# Altium PCB newUTC.PcbDoc
Units mm, origin at the board's own origin, x right, y up, seen from the top; angles counter-clockwise.
Board outline 67.2 x 65.1 mm, 2 copper layers (Top Layer, Bottom Layer); 67 components, 49 nets, 278 pads, 72 vias.
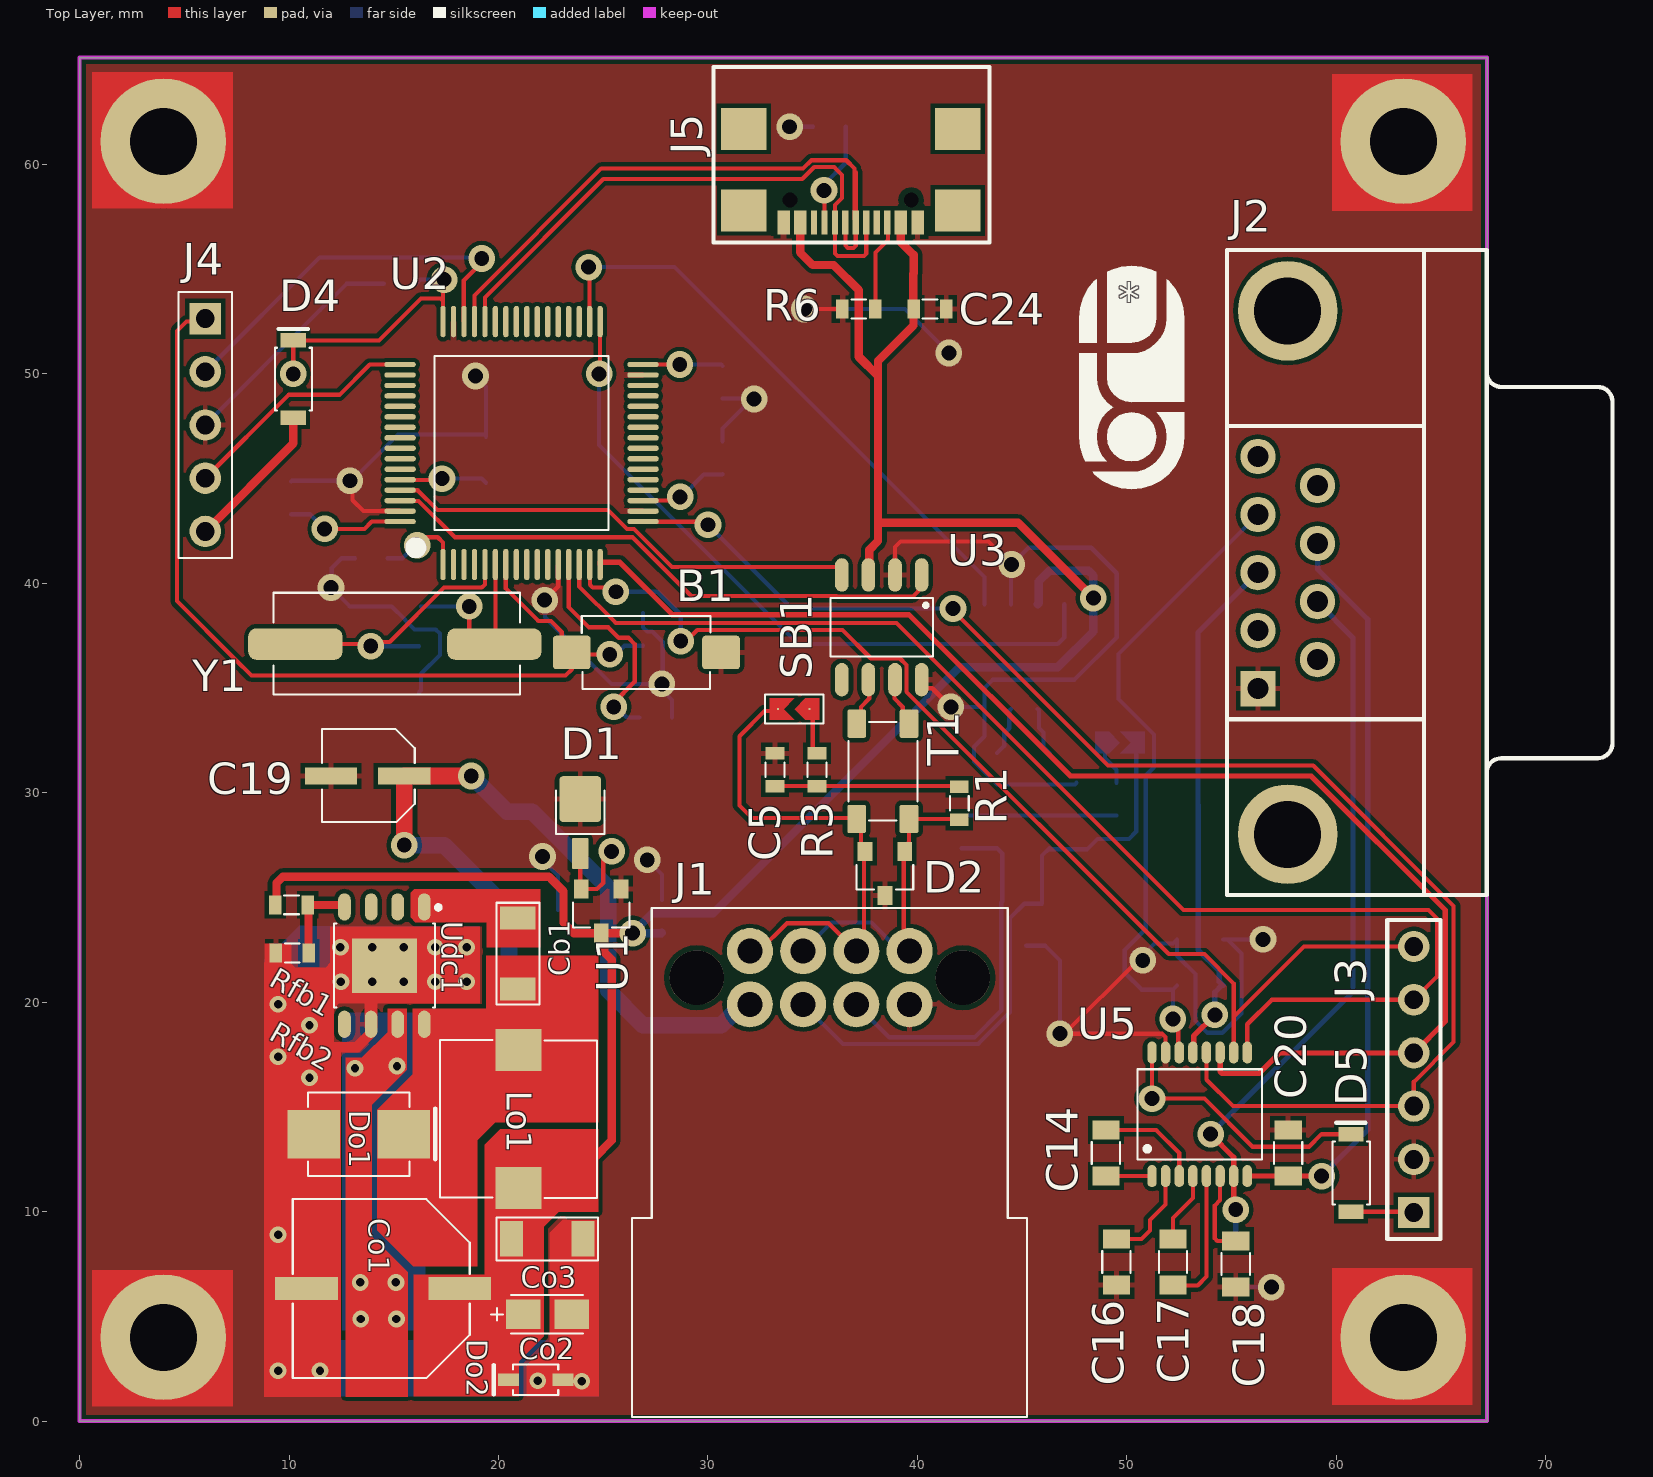
[diagram p0: Top Layer view]
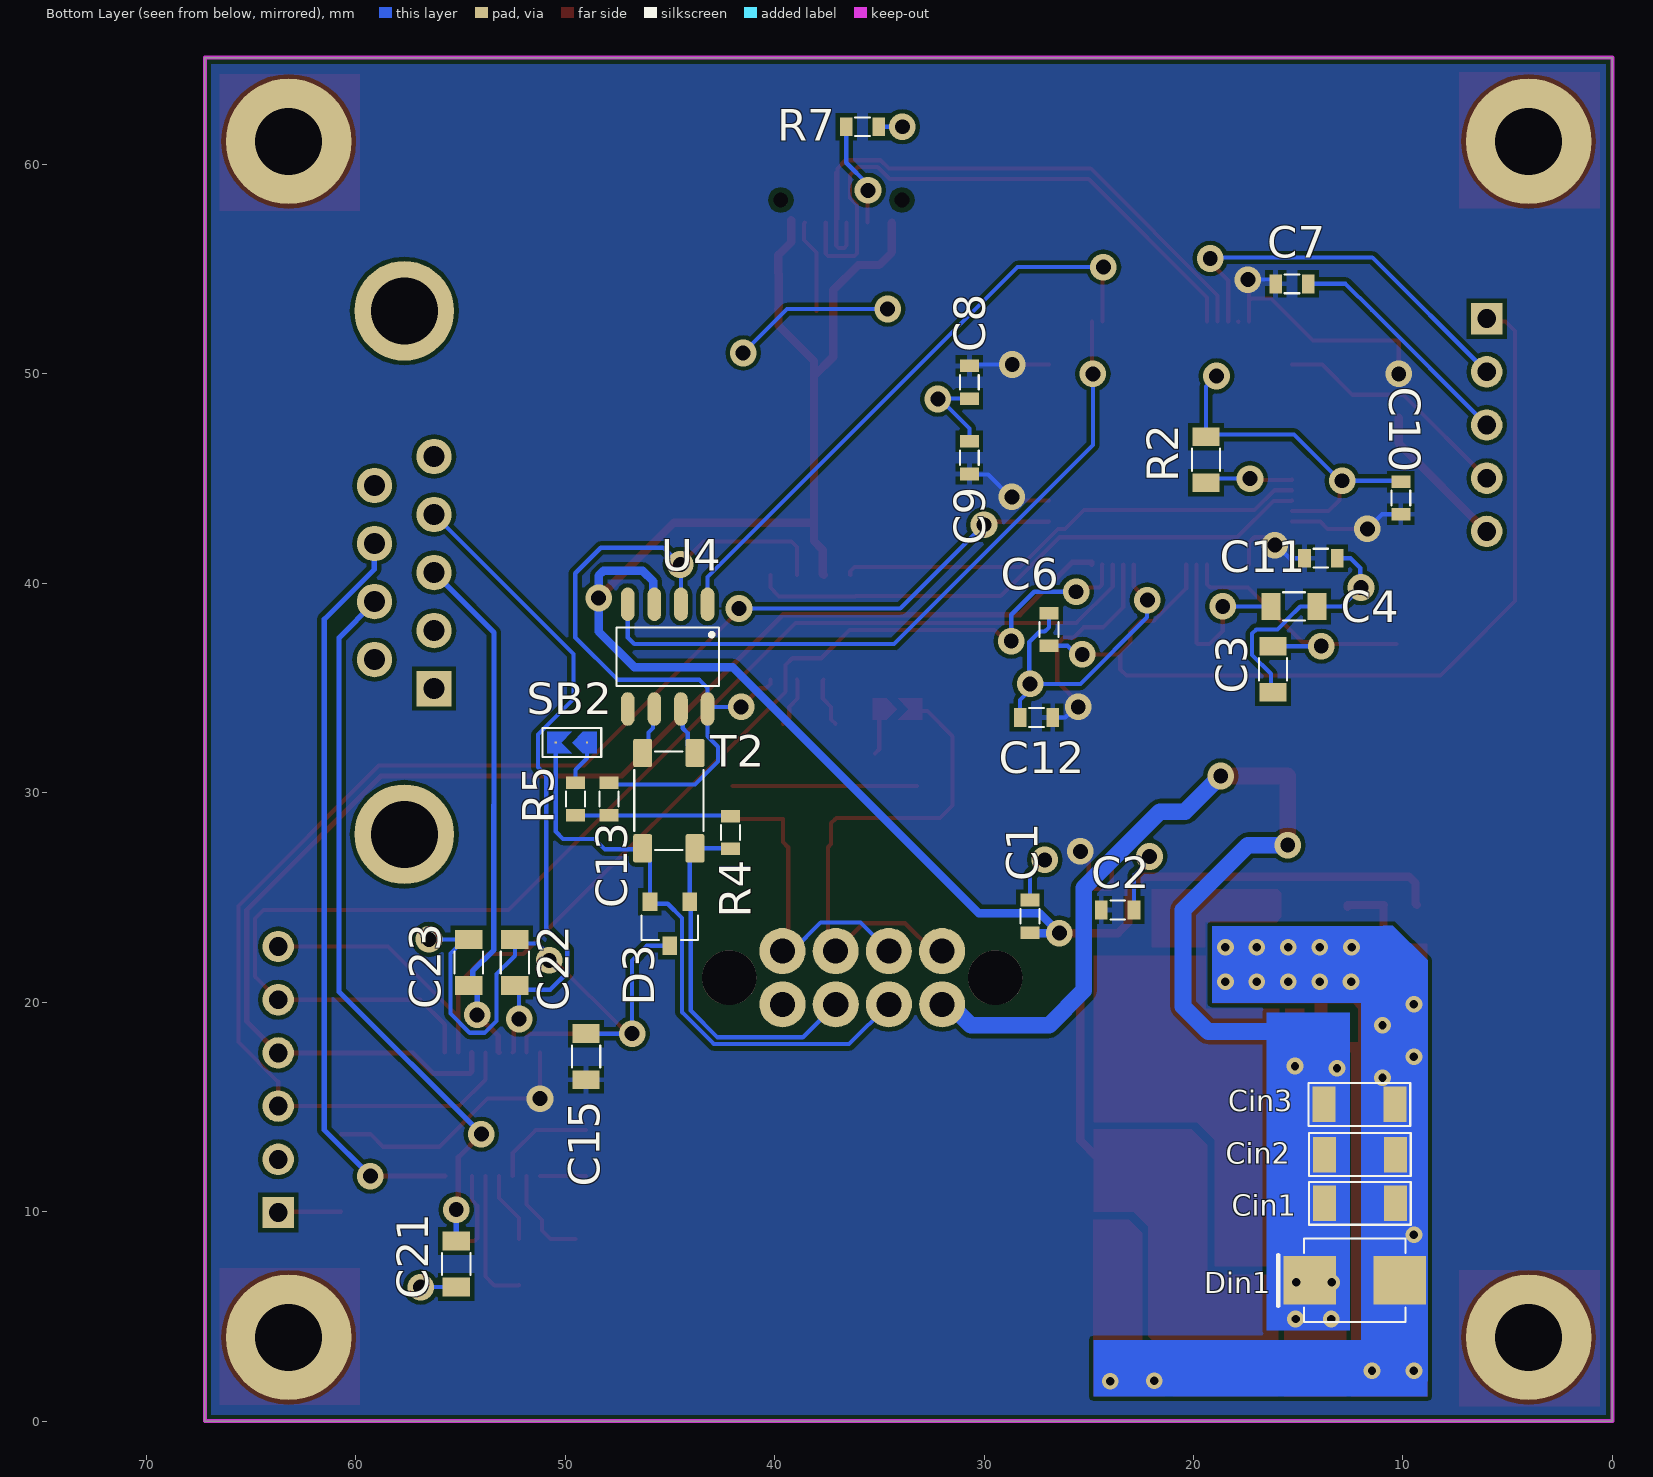
[diagram p1: Bottom Layer view, seen from below]
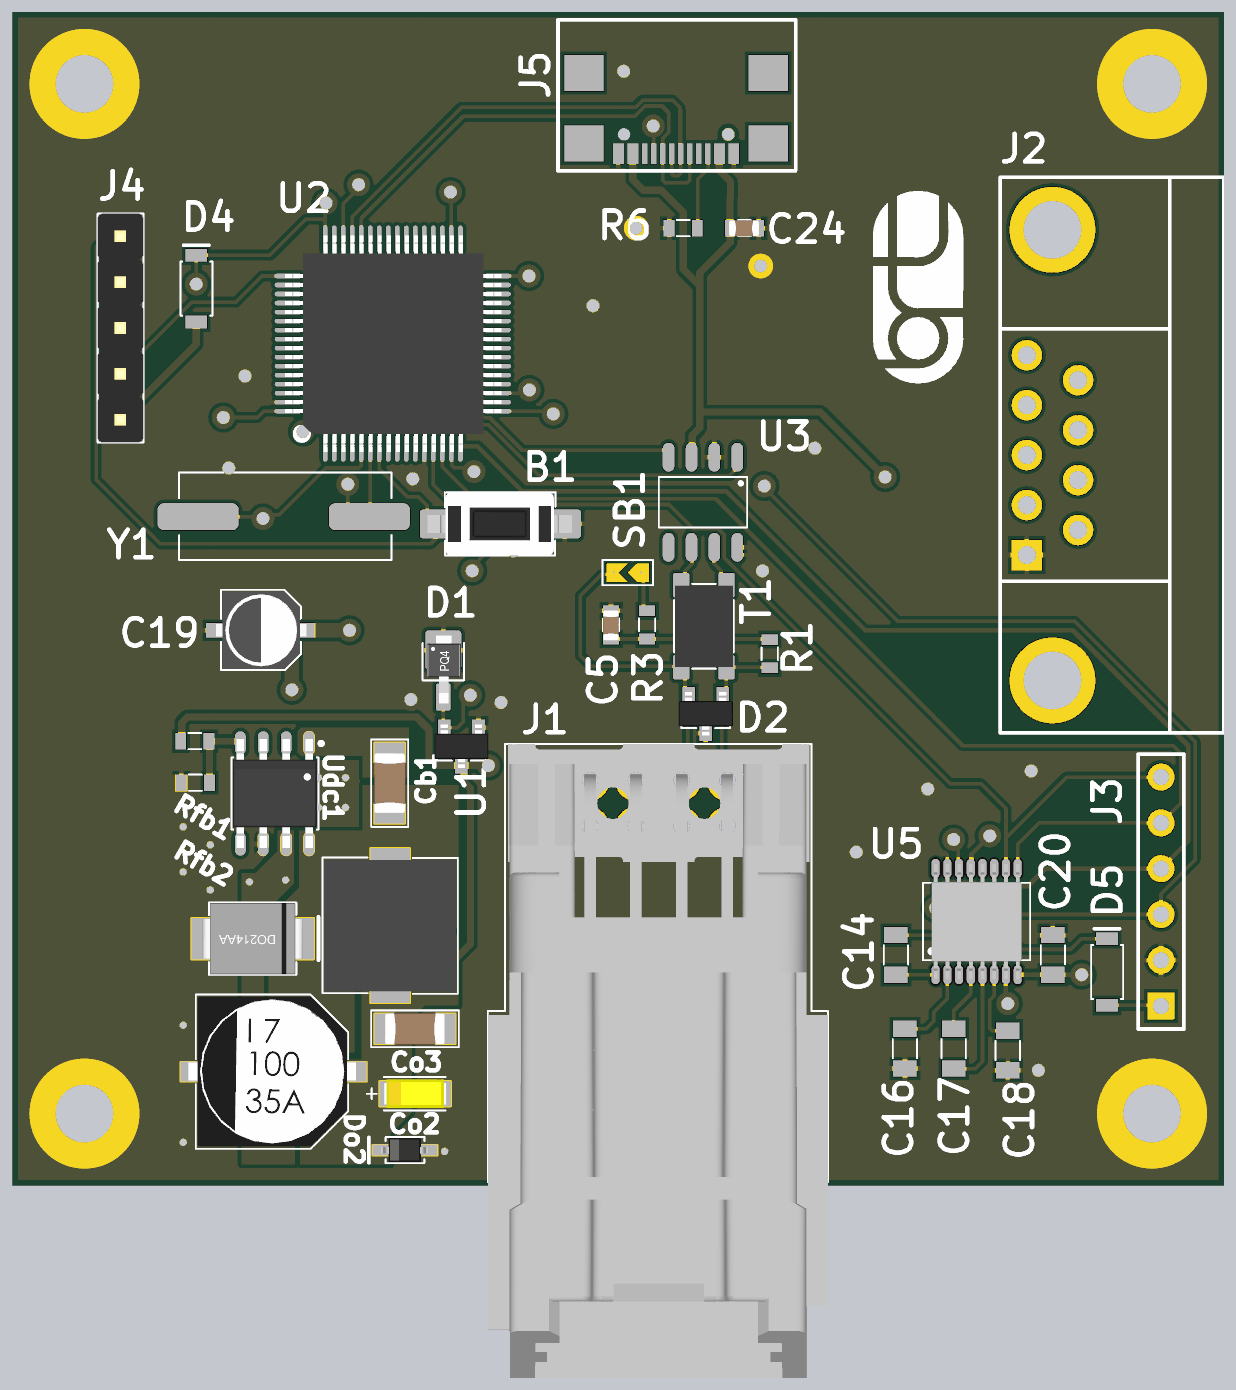
[diagram p2: 3D render of the assembled board from above, using the file's embedded part models]
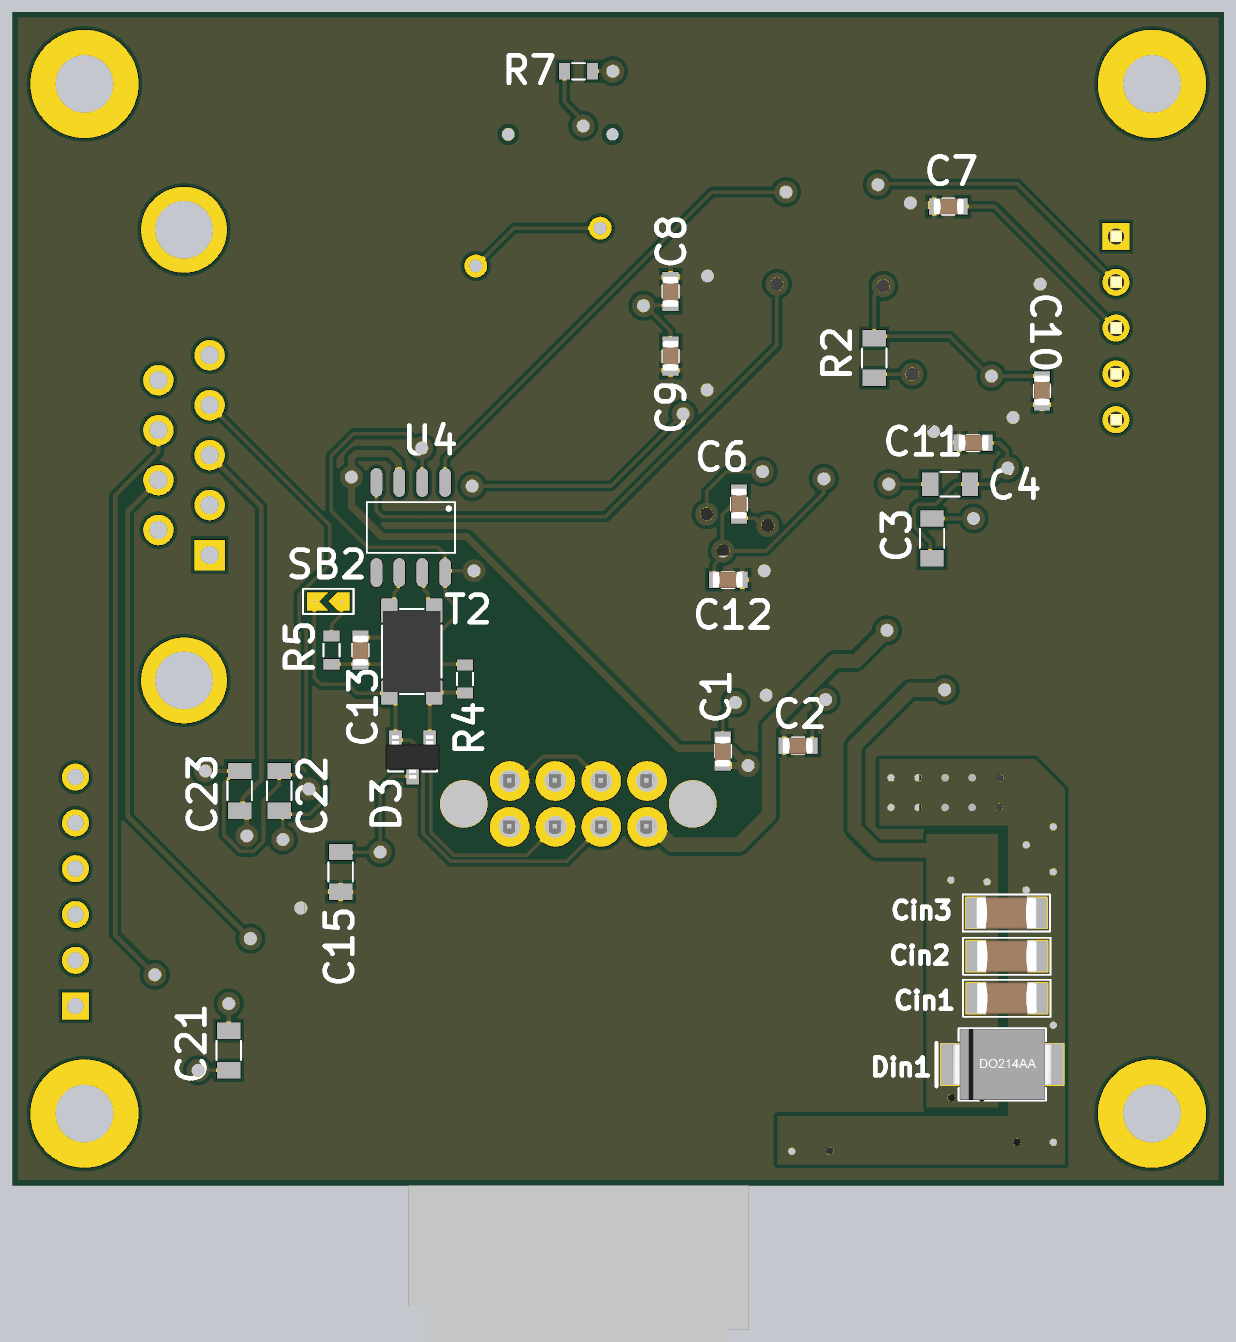
[diagram p3: 3D render of the assembled board from below, using the file's embedded part models]

## Layer stack, top to bottom
Top Solder: solder mask 0.0102, Solder Resist, Dk 3.5
Top Layer: signal copper 0.0356
Dielectric 1: dielectric 0.32, FR-4, Dk 4.8
Bottom Layer: signal copper 0.0356
Bottom Solder: solder mask 0.0102, Solder Resist, Dk 3.5

## Board outline
0,0 0,65.1 67.2,65.1 67.2,0

## Design rules (kind name [scope] priority, off if disabled: settings)
AcuteAngle [All] p1: minimum=3.50000000000000E+0001 checktracksonly=FALSE
BoardOutlineClearance "BoardOutlineClearance 1" [All] p1: gap=0.25 ignorepadtopadclearanceinfootprint=FALSE except(0: Arc-SplitContinuation Track-SplitContinuation SMDPad-SplitContinuation THPad-SplitContinuation Via-SplitContinuation Fill-SplitContinuation Poly-SplitContinuation Region-SplitContinuation Text-SplitContinuation) // Milling
Clearance "Clearance-1 1/2 Oz" [All] p1: gap=0.125 ignorepadtopadclearanceinfootprint=FALSE except(0.2: Arc-Fill Arc-Poly Track-Fill Track-Poly SMDPad-SMDPad SMDPad-Fill SMDPad-Poly THPad-Fill THPad-Poly Via-Fill Via-Poly Fill-Fill Fill-Poly Poly-Poly Poly-Region Poly-Text; 0.25: Arc-Hole Track-Hole SMDPad-Hole THPad-Hole Via-Hole Fill-Hole Poly-Hole Region-Hole Text-Hole) // Standart
ComponentClearance [All] p1: gap=0.1 collisioncheckmode=3 verticalgap=0.1 showdistances=FALSE
DiffPairsRouting "DiffPairsRouting 1/2 Oz" [All] p1: maxlimit=0.254 minlimit=0.125 mostfreqgap=0.254 toplayer_minwidth=0.125 toplayer_maxwidth=0.381 toplayer_prefwidth=0.381 bottomlayer_minwidth=0.125 bottomlayer_maxwidth=0.381 bottomlayer_prefwidth=0.381 maxuncoupledlength=12.7
HoleSize "Minimum HoleSize" [IsPad] p1: absolutevalues=TRUE maxlimit=5.9 minlimit=0.6 maxpercent=80.000 minpercent=20.000
HoleSize "Minimum HoleSize VIA 1" [IsVia] p2: absolutevalues=TRUE maxlimit=5.9 minlimit=0.3 maxpercent=80.000 minpercent=20.000 // Standart
HoleToHoleClearance Hole2HoleClearance [All] p1: gap=0.25 allowstackedmicrovias=FALSE
MinimumAnnularRing "Minimum AR VIA Standart" [All] p1: minimumring=0.15
MinimumAnnularRing "Minimum AR PAD Standart" [All] p2: minimumring=0.2
MinimumSolderMaskSliver "SolderMask Bridge Standart" [All] p1: minsoldermaskwidth=0.15 // All Masks
PlaneClearance "PlaneClearance-1 1/2 Oz" [All] p1: clearance=0.2 // Standart
PlaneConnect "TermalConnect-1 1/2 Oz" [All] p1: planeconnectstyle=Relief reliefexpansion=0.2 reliefentries=4 reliefconductorwidth=0.2 reliefairgap=0.2 // Standart
PolygonConnect "PolygonConnect-1 1/2 Oz" [All] p1: thpad.connectstyle=Relief thpad.reliefconductorwidth=0.254 thpad.reliefentries=4 thpad.polygonreliefangle="90 Angle" thpad.airgapwidth=0.2 smdpad.connectstyle=Relief smdpad.reliefconductorwidth=0.254 smdpad.reliefentries=4 smdpad.polygonreliefangle="90 Angle" smdpad.airgapwidth=0.2 via.connectstyle=Direct via.reliefconductorwidth=0.254 via.reliefentries=4 via.polygonreliefangle="90 Angle" via.airgapwidth=0.254 // Standart
RoutingCorners [All] p1 off: cornerstyle=45-Degree minsetback=2.54 maxsetback=2.54
RoutingVias [All] p1: holewidth=0.4 width=0.8 viastyle="Through Hole" minholewidth=0.3 minwidth=0.6 maxholewidth=5.9 maxwidth=8.9
SilkToSilkClearance Silk2SilkClearance [All] p1 off: silktosilkclearance=0.15
SilkToSolderMaskClearance Silk2SolderMaskClearance [IsPad] p1 off: minsilkscreentomaskgap=0.15 clearancetoexposedcopper=TRUE
SolderMaskExpansion SolderMaskExpansion-1 [All] p1: expansion=0.05 istentingtop=FALSE // Standart
UnRoutedNet [All] p1: checkbadconnections=TRUE
Width "Width 1/2 Oz" [All] p1: maxlimit=10 minlimit=0.125 preferedwidth=0.254 checkconnectedcopper=TRUE
19 further rules are at their usual default settings.

## Classes and differential pairs
component class DС-DC_5.5-36V_5A_Filtered: Cb1 Cin1 Cin2 Cin3 Co1 Co2 Co3 Din1 Do1 Do2 Lo1 Rfb1 Rfb2 Udc1
component class UTC: * B1 C1 C2 C3 C4 C5 C6 C7 C8 C9 C10 C11 C12 C13 C14 C15 C16 C17 C18 C19 C20 C21 C22 C23 C24 D1 D2 D3 D4 D5 J1 J2 J3 J4 J5 R1 R2 R3 R4 R5 R6 R7 SB1 SB2 T1 T2 U1 U2 U3 U4 U5 Y1
differential pair MAINCAN: +MAINCAN_P -MAINCAN_N
differential pair MAINCAN1: +MAINCAN1_P -MAINCAN1_N
differential pair DL_CAN: +DL_CAN_P -DL_CAN_N
differential pair DL_CAN1: +DL_CAN1_P -DL_CAN1_N

## Components (designator, comment, footprint, x,y, rotation, side; value= is the part's Value field where it differs from the comment)
* "BRT Log" BRT_Log 50.2,49.9 r90 top
B1 "But" "BUTTON 6x3.5" 23.5,36.7 r90 top
C1 "0.1uF" "0603 Capicator" 27.8,24.1 r270 bottom
C2 "0.1uF" "0603 Capicator" 23.62,24.4 r0 bottom
C3 "18pF" "0805 Capicator" 16.2,35.9 r270 bottom
C4 "18pF" "0805 Capicator" 15.2,38.9 r180 bottom
C5 "4.7uF" "0603 Capicator" 33.2,31.1 r270 top
C6 "0.1uF" "0603 Capicator" 26.9,37.8 r90 bottom
C7 "0.1uF" "0603 Capicator" 15.3,54.3 r180 bottom
C8 "0.1uF" "0603 Capicator" 30.7,49.6 r270 bottom
C9 "0.1uF" "0603 Capicator" 30.7,46 r90 bottom
C10 "0.1uF" "0603 Capicator" 10.1,44.08 r90 bottom
C11 "0.1uF" "0603 Capicator" 13.92,41.2 r180 bottom
C12 "4.7uF" "0603 Capicator" 27.5,33.6 r0 bottom
C13 "4.7uF" "0603 Capicator" 47.9,29.7 r270 bottom
C14 "0.1uF" "0805 Capicator" 49,12.8 r270 top
C15 "0.1uF" "0805 Capicator" 49,17.4 r90 bottom
C16 "0.1uF" "0805 Capicator" 49.5,7.6 r90 top
C17 "0.1uF" "0805 Capicator" 52.2,7.6 r90 top
C18 "0.1uF" "0805 Capicator" 55.2,7.5 r90 top
C19 "4.7uF" "Bar Cap 4x5.4" 12,30.8 r90 top
C20 "150pF" "0805 Capicator" 57.7,12.8 r270 top
C21 "150pF" "0805 Capicator" 55.2,7.5 r90 bottom
C22 "150pF" "0805 Capicator" 52.4,21.9 r270 bottom
C23 "150pF" "0805 Capicator" 54.6,21.9 r90 bottom
C24 "4.7uF" "0603 Capicator" 40.6,53.1 r180 top
Cb1 "10nF" "1206 Capacitor" 20.925,22.325 r90 top
Cin1 "4.7uF" "1206 Capacitor" 12.05,10.4 r0 bottom
Cin2 "4.7uF" "1206 Capacitor" 12.05,12.725 r0 bottom
Cin3 "10nF" "1206 Capacitor" 12.075,15.125 r0 bottom
Co1 "330uF" "Bar Cap 8x10.5" 10.825,6.325 r90 top
Co2 "10uF" TANTAL_A_CASE 22.675,5.1 r180 top
Co3 "10nF" "1206 Capacitor" 22.325,8.7 r180 top
D1 "TVS 3.3V" DO-216AA 23.9,28.6 r270 top
D2 "TVS" SOT-23 39.4,27.2 r180 top
D3 "TVS" SOT-23 44.05,24.8 r0 bottom
D4 "Diode" sod-123 10.2,47.9 r90 top
D5 "Diode" sod-123 60.7,10 r90 top
Din1 "TVS 36V" SMB 12.3,6.725 r0 bottom
Do1 "Diode" SMB 13.325,13.7 r0 top
Do2 "TVS 5V" sod-323 23.075,1.975 r180 top
J1 "Stack64 4x2" "CONN 4X2 (MOLEX)" 32.004,22.442 r0 top
J2 "DB9" DB9 57.68,53.01 r270 top
J3 "Header 6" HDR1X6 63.7,9.96 r90 top
J4 "PLS 5x1" "PLS 5x1" 6,52.64 r270 top
J5 "USB Type C 2.0 16 pin" "USB TYPE C 16PIN" 36.81,57.225 r180 top
Lo1 "15uH" "Inductor 7x7" 20.95,14.425 r270 top
R1 "62R" "0603 Resistor" 42,29.5 r270 top
R2 "3.9k" "0805 Resistor" 19.4,45.9 r90 bottom
R3 "62R" "0603 Resistor" 35.2,31.1 r270 top
R4 "62R" "0603 Resistor" 42.1,28.1 r270 bottom
R5 "62R" "0603 Resistor" 49.5,29.7 r270 bottom
R6 "4.7k" "0603 Resistor" 37.2,53.1 r0 top
R7 "4.7k" "0603 Resistor" 35.8,61.8 r0 bottom
Rfb1 "62R" "0603 Resistor" 10.12,24.65 r180 top
Rfb2 "3k" "0603 Resistor" 10.15,22.35 r0 top
SB1 "Circuit Breaker" "SB 0603" 34,34 r0 top
SB2 "Circuit Breaker" "SB 0603" 49.8,32.4 r180 bottom
T1 "ACT45B" ACT45B 37.1,33.975 r270 top
T2 "ACT45B" ACT45B 46.3,32.575 r270 bottom
U1 "LDO 3.3V" SOT-23 25.85,25.4 r180 top
U2 "STM32F105RCT6" LQFP64 21.1,46.699 r90 top
U3 "CAN_Rx/Tx" SOIC-8 40.2,40.401 r270 top
U4 "CAN_Rx/Tx" SOIC-8 43.2,39.001 r270 bottom
U5 "MAX3232  transceiver" TSSOP-16 51.2,11.7 r0 top
Udc1 "DC/DC" HSOP-8 14.55,21.75 r270 top
Y1 "8MHz" hc-49sm 19.8,37.1 r180 top

## Footprints (in the part's own frame and the unit in brackets; to place one, negate y for a bottom-side part, rotate by r counter-clockwise, add the part's x,y. Pads: shape width x height; smd on the part's side, far side on the other; paste and mask are expansions set on the pad)
"0603 Capicator" [mm]
  rect 0.6x0.9 smd: 1(-0.78,0) 2(0.78,0)
  silkscreen extent -0.35,-0.45 0.35,0.45, body extent -0.82,-0.45 0.88,0.45, height 0.9
"0603 Resistor" [mm]
  rect 0.6x0.9 smd: 1(-0.78,0) 2(0.78,0)
  silkscreen extent -0.35,-0.45 0.35,0.45, body extent -0.85,-0.45 0.85,0.45, height 0.55
"0805 Capicator" [mm]
  rect 0.9x1.3 smd: 1(-1.1,0) 2(1.1,0)
  silkscreen extent -0.53,-0.67 0.53,0.67, body extent -1.05,-0.67 1.05,0.68, height 0.75
"0805 Resistor" [mm]
  rect 0.9x1.3 smd: 1(-1.1,0) 2(1.1,0)
  silkscreen extent -0.53,-0.67 0.53,0.67, body extent -1.05,-0.67 1.05,0.68, height 0.6
"1206 Capacitor" [mm]
  rect 1.1x1.7 smd: 1(-1.7,0) 2(1.7,0)
  silkscreen extent -2.42,-1.02 2.42,1.02, body extent -1.68,-0.87 1.67,0.87, height 1
ACT45B [mm]
  rrect20% 1.35x0.9 smd: 1(0.675,2.5) 2(0.675,0) 3(5.225,0) 4(5.225,2.5)
  silkscreen extent 0.6,-0.4 5.3,2.9, body extent 0.7,-0.35 5.2,2.85, height 3
"Bar Cap 4x5.4" [mm]
  rect 0.8x2.5 smd: 1(0,0) 2(0,-3.5)
  silkscreen extent -2.2,-4 2.25,0.43, body extent -2.15,-4.3 2.15,0.7, height 5.4
"Bar Cap 8x10.5" [mm]
  rect 1.1x3 smd: 1(0,0) 2(0,-7.325)
  silkscreen extent -4.28,-7.8 4.28,0.65, body extent -4.14,-8.24 4.16,1.06, height 10.31
BRT_Log [mm]
  silkscreen extent -5.42,-2.54 5.27,2.48
"BUTTON 6x3.5" [mm]
  rrect20% 1.6x1.8 smd: 1(0,0) 2(0,-7.125)
  silkscreen extent -1.75,-6.63 1.75,-0.48, body extent -1.75,-7.52 1.75,0.48, height 4.3
"CONN 4X2 (MOLEX)" [mm]
  round 2.2 hole 1.2: 1(0,0.002) 2(2.54,0.002) 3(5.08,0.002) 4(7.62,0) 5(-0.004,-2.542) 6(2.536,-2.542) 7(5.075,-2.542) 8(7.615,-2.542)
  round 2.6 hole 2.6: A(-2.54,-1.27) A(10.16,-1.27)
  silkscreen extent -5.64,-22.25 13.22,2.06, body extent -5.64,-33.12 13.22,2.05, height 22.3
DB9 [mm]
  rect 1.69x1.69 hole 1: 1(18.035,-1.42)
  round 1.69 hole 1: 2(15.265,-1.42) 3(12.495,-1.42) 4(9.725,-1.42) 5(6.955,-1.42) 6(16.65,1.42) 7(13.88,1.42) 8(11.11,1.42) 9(8.34,1.42)
  round 4.76 hole 3.2: A(0,0) A(24.99,0)
  silkscreen extent -2.91,-2.9 27.89,15.5, body extent -2.97,-2.85 27.92,15.55, height 12.53
DO-216AA [mm]
  rrect20% 2.2x2 smd: 1(-1.1,0)
  rrect20% 1.5x0.8 smd: 2(1.5,0)
  silkscreen extent -1.5,-1.15 0.58,1.15, body extent -1.91,-0.93 1.85,0.98, height 1.02
hc-49sm [mm]
  rrect50% 4.5x1.5 smd: 1(0,0) 2(9.5,0)
  silkscreen extent -1.23,-2.45 10.55,2.4, body extent -1.7,-2.44 11.1,2.39
HDR1X6 [mm] "Connector; Header; 6 Position"
  rect 1.5x1.5 hole 0.9: 1(0,0)
  round 1.5 hole 0.9: 2(2.54,0) 3(5.08,0) 4(7.62,0) 5(10.16,0) 6(12.7,0)
  silkscreen extent -1.27,-1.27 13.97,1.27
HSOP-8 [mm]
  oval 1.3x0.6 smd mask+0.03: 1(-2.8,1.905) 2(-2.8,0.635) 3(-2.8,-0.635) 4(-2.8,-1.905) 5(2.8,-1.905) 6(2.8,-0.635) 7(2.8,0.635) 8(2.8,1.905)
  rect 2.6x3.1 smd mask+0.03: A(0,0)
  silkscreen extent -2.87,-2.4 2,2.68, body extent -3.01,-2.35 3.01,2.35, height 1.7
"Inductor 7x7" [mm]
  rect 2x2.2 smd: 1(-3.3,0) 2(3.3,0)
  silkscreen extent -3.77,-3.75 3.77,3.75, body extent -3.65,-3.65 3.65,3.65, height 4.5
LQFP64 [mm]
  oval 1.5x0.254 smd paste+0 mask+0.02: 1(-5.8,3.75) 2(-5.8,3.25) 3(-5.8,2.75) 4(-5.8,2.25) 5(-5.8,1.75) 6(-5.8,1.25) 7(-5.8,0.75) 8(-5.8,0.25) 9(-5.8,-0.25) 10(-5.8,-0.75) 11(-5.8,-1.25) 12(-5.8,-1.75) 13(-5.8,-2.25) 14(-5.8,-2.75) 15(-5.8,-3.25) 16(-5.8,-3.75) 33(5.8,-3.75) 34(5.8,-3.25) 35(5.8,-2.75) 36(5.8,-2.25) 37(5.8,-1.75) 38(5.8,-1.25) 39(5.8,-0.75) 40(5.8,-0.25) 41(5.8,0.25) 42(5.8,0.75) 43(5.8,1.25) 44(5.8,1.75) 45(5.8,2.25) 46(5.8,2.75) 47(5.8,3.25) 48(5.8,3.75)
  oval 0.254x1.5 smd paste+0 mask+0.02: 17(-3.75,-5.8) 18(-3.25,-5.8) 19(-2.75,-5.8) 20(-2.25,-5.8) 21(-1.75,-5.8) 22(-1.25,-5.8) 23(-0.75,-5.8) 24(-0.25,-5.8) 25(0.25,-5.8) 26(0.75,-5.8) 27(1.25,-5.8) 28(1.75,-5.8) 29(2.25,-5.8) 30(2.75,-5.8) 31(3.25,-5.8) 32(3.75,-5.8) 49(3.75,5.8) 50(3.25,5.8) 51(2.75,5.8) 52(2.25,5.8) 53(1.75,5.8) 54(1.25,5.8) 55(0.75,5.8) 56(0.25,5.8) 57(-0.25,5.8) 58(-0.75,5.8) 59(-1.25,5.8) 60(-1.75,5.8) 61(-2.25,5.8) 62(-2.75,5.8) 63(-3.25,5.8) 64(-3.75,5.8)
  silkscreen extent -5.2,-4.15 4.15,5.25, body extent -6,-6.02 6,5.98, height 1.56
"PLS 5x1" [mm] "Connector; Header; 5 Position"
  rect 1.5x1.5 hole 0.9: 1(0,0)
  round 1.5 hole 0.9: 2(2.54,0) 3(5.08,0) 4(7.62,0) 5(10.16,0)
  silkscreen extent -1.27,-1.27 11.43,1.27, body extent -1.28,-1.28 11.42,1.26, height 8.54
"SB 0603" [mm] "Jumper"
  rect 0.1x0.1 smd: 1(-0.65,0) 2(0.85,0)
  Top Layer region: 0.641,-0.508 0.134,0 0.642,0.508 1.309,0.508 1.309,-0.508
  Top Layer region: 0.12,-0.508 -0.388,0 0.12,0.508 -1.05,0.508 -1.05,-0.508
  silkscreen extent -1.28,-0.7 1.53,0.7
SMB [mm]
  rect 2.5x2.3 smd: 1(-2.15,0) 2(2.15,0)
  silkscreen extent -2.42,-2 3.65,2, body extent -2.79,-1.97 2.79,1.97, height 2.65
sod-123 [mm]
  rect 0.7x1.2 smd: 1(0,0) 2(3.7,0)
  silkscreen extent 0.35,-0.9 4.25,0.87, body extent 0,-0.8 3.7,0.8
sod-323 [mm]
  rect 1x0.6 smd: 1(0,0) 2(2.6,0)
  silkscreen extent 0.23,-0.72 3.3,0.72, body extent 0.03,-0.68 2.63,0.67, height 1.1
SOIC-8 [mm]
  oval 1.6x0.65 smd: 1(0,0) 2(0,-1.27) 3(0,-2.54) 4(0,-3.81) 5(5,-3.81) 6(5,-2.54) 7(5,-1.27) 8(5,0)
  silkscreen extent 1.1,-4.35 3.9,0.55, body extent -0.36,-4.35 5.41,0.55, height 1.45
SOT-23 [mm]
  rect 0.7x0.9 smd: 1(0,0) 2(1.9,0) 3(0.95,2.1)
  silkscreen extent -0.4,0.65 2.3,1.83, body extent -0.55,-0.17 2.45,2.23, height 1.1
TANTAL_A_CASE [mm]
  rect 1.65x1.4 smd: 1(-0.825,0) 2(1.5,0)
  silkscreen extent -1.35,-0.92 3.03,0.92, body extent -1.39,-0.8 2.07,0.8, height 1.65
TSSOP-16 [mm]
  oval 0.45x1.05 smd paste+0 mask+0.1: 1(0,0) 2(0.65,0) 3(1.3,0) 4(1.95,0) 5(2.6,0) 6(3.25,0) 7(3.9,0) 8(4.55,0) 9(4.55,5.9) 10(3.9,5.9) 11(3.25,5.9) 12(2.6,5.9) 13(1.95,5.9) 14(1.3,5.9) 15(0.65,5.9) 16(0,5.9)
  silkscreen extent -0.7,0.8 5.25,5.1, body extent -0.23,-0.25 4.78,6.15
"USB TYPE C 16PIN" [mm]
  round 0.65 hole 0.7 mask+0.03: 17(-2.89,-1.075)
  round 0.65 hole 0.7 unplated mask+0.03: 18(2.89,-1.075)
  rect 0.6x1.15 smd mask+0.03: A1(-3.2,0) A4(-2.4,0) A4(2.4,0) A12(3.2,0)
  rect 0.3x1.15 smd mask+0.03: A5(-1.75,0) A6(-0.25,0) A7(0.75,0) A8(1.75,0) B5(1.25,0) B6(0.25,0) B7(-0.75,0) B8(-1.25,0)
  rect 2.18x2 smd: GND(-5.11,-0.575) GND(-5.11,-4.475) GND(5.11,-0.575) GND(5.11,-4.475)
  silkscreen extent -6.63,-7.42 6.55,0.95

## Part data
*: "Team Logo"
B1: library part "Button 2 Conn", "Button 2 Conn SMD", Manufacturer="KLS electronic co ltd", Part Number=L-KLS7-TS3608-5.0-180, ComponentLink1Description=Chip&Dip, ComponentLink1URL=https://www.chipdip.ru/product/kls7-ts3608-5.0-180-td-02xa, Type=Button
C1 C2 C6 C7 C8 C9 C10 C11: library part "Cap 0.1uF (0603)", "0.1uF X7R 16V 10% 0603", Manufacturer="Murata Manufacturing", Part Number=GRM188R71C104KA01D, ComponentLink1Description=Chip&Dip, ComponentLink1URL=https://www.chipdip.ru/product/grm188r71c104ka01d, Type=Capacitor
C3 C4: library part "Cap 18pF (0805)", "18pF NP0 50V 5% 0805", Manufacturer="Murata Manufacturing", Part Number=GRM2165C1H180JD01D, ComponentLink1Description=Chip&Dip, ComponentLink1URL=https://www.chipdip.ru/product/grm2165c1h180j, Type=Capacitor
C5 C12 C13 C24: library part "Cap 4.7uF (0603)", "4.7uF X5R 25V 10% 0603", Manufacturer="Murata Manufacturing", Part Number=GRM188R61E475KE11D, ComponentLink1Description=Chip&Dip, ComponentLink1URL=https://www.chipdip.ru/product0/9000348448, Type=Capacitor
C14 C15 C16 C17 C18: library part "Cap 0.1uF (0805)", "0.1uF X7R 25V 10% 0805", Manufacturer="Murata Manufacturing", Part Number=GRM21BR71E104KA01L, ComponentLink1Description=Chip&Dip, ComponentLink1URL=https://www.chipdip.ru/product/grm21br71e104ka01l, Type=Capacitor
C19: library part "Cap Pol 4.7uF", "ECAP SMD,  35V, 105°C", Manufacturer=Epcos, Part Number=B41121A7475M000, ComponentLink1Description=Chip&Dip, ComponentLink1URL=https://www.chipdip.ru/product/b41121a7475m000, Type=Capacitor
C20 C21 C22 C23: library part "Cap 150pF (0805)", "150pF NPO 5% 50V 0805", Manufacturer=Murata, Part Number=GRM2165C1H151JA01D, ComponentLink1Description=Chip&Dip, ComponentLink1URL=https://www.chipdip.ru/product/grm2165c1h151j, Type=Capacitor
Cb1 Cin3 Co3: library part "Cap 10nF (1206)", "10nF X7R 10% 50V 1206", Manufacturer="Murata Manufacturing", Part Number=GRM319R71H103KA01D, ComponentLink1Description=Chip&Dip, ComponentLink1URL=https://www.chipdip.ru/product/grm319r71h103k, Type=Capacitor
Cin1 Cin2: library part "Cap 4.7uF (1206)", "4.7uF X7R 10% 50V 1206", Manufacturer="Murata Manufacturing", Part Number=GRM31CR71H475KA12L, ComponentLink1Description=Chip&Dip, ComponentLink1URL=https://www.chipdip.ru/product/grm31cr71h475ka12l, Type=Capacitor
Co1: library part "Cap Pol 330uF", "ECAP SMD,  16V, 105°C, 20%", Manufacturer=JB, Part Number=JCK1C331M080105, ComponentLink1Description=Chip&Dip, ComponentLink1URL=https://www.chipdip.ru/product0/9000565746, Type=Capacitor
Co2: library part "Cap Tantal 10uF (SMDA)", "TECAP, 10uF, 16V, case A, 10%", Manufacturer=China, Part Number=373033076, ComponentLink1Description=Chip&Dip, ComponentLink1URL=https://www.chipdip.ru/product0/373033076, Type=Capacitor
D1: library part "TVS Diode 3.3V [SM2T]", "High peak pulse power: 200 W (10/1000 μs)", Manufacturer=STMicroelectronics, Part Number=SM2T3V3A, ComponentLink1Description=DataSheet, ComponentLink1URL=https://www.st.com/resource/en/datasheet/sm2t3v3a.pdf, ComponentLink2Description=Chip&Dip, ComponentLink2URL=https://www.chipdip.ru/product0/8283670575, Type=Diode
D2 D3: library part "TVS Diode Arrays", "The SM24CANB TVS Diode Array is designed to protect automotive Controller Area Network (CAN) lines from damage due to electrostatic discharge (ESD), electrical fast transient (EFT), and other overvoltage transients.", Manufacturer=Littelfuse, Part Number=SM24CANB-02HTG, ComponentLink1Description=DataSheet, ComponentLink1URL=https://m.littelfuse.com/~/media/electronics/datasheets/tvs_diode_arrays/littelfuse_tvs_diode_array_sm24canb_datasheet.pdf.pdf, ComponentLink2Description=Chip&Dip, ComponentLink2URL=https://www.chipdip.ru/product1/8001779022, Type=Diode
D4 D5: library part "Diode Schottky (SOD-123)", "0.5 A, Low Forward Voltage less than 385 mV, 400 mW Power Dissipation Package", Manufacturer="ON Semiconductor", Part Number=MBR0520L, ComponentLink1Description=DataSheet, ComponentLink1URL=http://www.farnell.com/datasheets/1875336.pdf, ComponentLink2Description=Chip&Dip, ComponentLink2URL=https://www.chipdip.ru/product/mbr0520l, Type=Diode
Din1: library part "TVS Diode 36V [SM6T]", "600W", Manufacturer=STMicroelectronics, Part Number=SM6T36CA, ComponentLink1Description=DataSheet, ComponentLink1URL=https://static6.arrow.com/aropdfconversion/2bbceae9338c8edef500ca51dc612d5485c99b0/80725453396644cd000.pdf, ComponentLink2Description=Chip&Dip, ComponentLink2URL=https://www.chipdip.ru/product/sm6t36ca, Type=Diode
Do1: library part "Diode Schottky (SMB) [SK54]", "Diode Schottky 5A 40V", Manufacturer="Diotec Semiconductor", Part Number=SK54, ComponentLink1Description=DataSheet, ComponentLink1URL=https://static.chipdip.ru/lib/092/DOC001092363.pdf, ComponentLink2Description=Chip&Dip, ComponentLink2URL=https://www.chipdip.ru/product/sk54, Type=Diode
Do2: library part "TVS Diode 5V [PESD]", "ESD Suppressor TVS 30KV,130W,  SOD-323", Manufacturer=Nexperia, Part Number=PESD5V0S1BA,115, ComponentLink1Description=DataSheet, ComponentLink1URL=https://static.chipdip.ru/lib/160/DOC001160262.pdf, ComponentLink2Description=Chip&Dip, ComponentLink2URL=https://www.chipdip.ru/product/pesd5v0s1ba.115, Type=Diode
J1: library part "Conn 8 [Stack64]", "Stac64 Right-Angle Header Assembly, 8 Circuits, Polarization A, Black, Tray", Manufacturer="Molex Electronic Solutions", Part Number=346910080, ComponentLink1Description=Molex, ComponentLink1URL=https://www.molex.com/molex/products/part-detail/pcb_headers/0346910080, Type=Connector
J2: library part "Connector DB9", "CONN D-SUB PLUG 9POS R/A SOLDER", Manufacturer="Auk Contractors", Part Number=DR09S-H-CN, ComponentLink1Description=DataSheet, ComponentLink1URL=https://static.chipdip.ru/lib/009/DOC004009535.pdf, ComponentLink2Description=Chip&Dip, ComponentLink2URL=https://www.chipdip.ru/product/dr09s-h-cn-drb-9fa-dbr-9f, Type=Connector
J3: "Header, 6-Pin", LatestRevisionDate=17-Jul-2002, LatestRevisionNote="Re-released for DXP Platform.", Publisher="Altium Limited"
J4: library part "Conn 5 (PLS)", "Header, 5-Pin"
Lo1: library part "Inductor 15uH (0.2..3.6A)", "15uH, 1.53A, 7X7", Manufacturer=Epcos, Part Number=B82472G6153M000, ComponentLink1Description=DataSheet, ComponentLink1URL=https://static.chipdip.ru/lib/972/DOC003972643.pdf, ComponentLink2Description=Chip&Dip, ComponentLink2URL=https://www.chipdip.ru/product/b82472g6153m000-15, Type=Inductor
R1 R3 R4 R5 Rfb1: library part "Res 62R (0603)", "0.1W 0603 62R, 1%", Manufacturer=Taiwan, Part Number=RC0603FR-0762RL, ComponentLink1Description=Chip&Dip, ComponentLink1URL=https://www.chipdip.ru/product0/9000079611, Type=Resistor
R2: library part "Res 3.9k (0805)", "0.125W 0805 3.9k, 1%", Manufacturer=Taiwan, Part Number=RC0805FR-073K9L, ComponentLink1Description=Chip&Dip, ComponentLink1URL=https://www.chipdip.ru/product0/9000079500, Type=Resistor
R6 R7: library part "Res 4.7k (0603)", "0.1W 0603 4.7k, 1%", Manufacturer=Taiwan, Part Number=RC0603FR-074K7L, ComponentLink1Description=Chip&Dip, ComponentLink1URL=https://www.chipdip.ru/product0/9000079728, Type=Resistor
Rfb2: library part "Res 3k (0603)", "0.1W 0603 3k, 1%", Manufacturer=Taiwan, Part Number=RC0603FR-073KL, ComponentLink1Description=Chip&Dip, ComponentLink1URL=https://www.chipdip.ru/product0/9000079723, Type=Resistor
T1 T2: "Common mode filters / Automotive signal line (for power train/safety)", Manufacturer="EMC Components", Part Number=ACT45B-510-2P-TL003, ComponentLink1Description=DataSheet, ComponentLink1URL=https://product.tdk.com/info/en/catalog/datasheets/cmf_automotive_signal_act45b_en.pdf, Type=Inductor
U1: library part "LDO 3.3V [MCP]", "A family of CMOS low dropout (LDO)voltage  regulators  that  can  deliver  up  to  250 mA  ofcurrent  while  consuming  only  1.6 μA  of  quiescentcurrent (typical). The input operating range is specifiedfrom 2.3V to 6.0V", Manufacturer=Microchip, Part Number=MCP1700T-3302E/TT, ComponentLink1Description=DataSheet, ComponentLink1URL=https://static.chipdip.ru/lib/276/DOC000276804.pdf, ComponentLink2Description=Chip&Dip, ComponentLink2URL=https://www.chipdip.ru/product/mcp1700t-3302e-tt, ComponentLink3Description=Elitan, ComponentLink3URL=https://www.elitan.ru/price/item595361
U2: "MCU ARM 256KB FLASH MEM 64-LQFP", Manufacturer=STMicroelectronics, ComponentLink1Description=DataSheet, ComponentLink1URL=https://static6.arrow.com/aropdfconversion/3fd6bc01359f79a4f9745354b823e6b7c79e203b/2083962039691295cd00220364.pdf, ComponentLink2Description=Chip&Dip, ComponentLink2URL=https://www.chipdip.ru/product0/8001787632, Part Number=STM32F105RCT6, Type=IC
U3 U4: library part "CAN Transceiver [MCP2551]", "High-speed  CAN,  fault-tolerantdevice  that  serves  as  the  interface  between  a  CANprotocol controller and the physical bus.", Manufacturer=Microchip, Part Number=MCP2551-I/SN, ComponentLink1Description=DataSheet, ComponentLink1URL=https://static.chipdip.ru/lib/204/DOC000204457.pdf, ComponentLink2Description=Chip&Dip, ComponentLink2URL=https://www.chipdip.ru/product/mcp2551-i-sn, Type=IC
U5: library part "MAX 3232", "RS-232 Dual Transmitters/Receivers, Maxim Integrated", Manufacturer=Maxim, Part Number=MAX3232CSE+T, ComponentLink1Description=Chip&Dip, ComponentLink1URL=https://www.chipdip.ru/product/max3232cse, ComponentLink2Description=Datasheet, ComponentLink2URL=https://static.chipdip.ru/lib/222/DOC000222323.pdf, Type=Transceiver
Udc1: library part "DC/DC Controller [TPS54]", "The TPS5450 is  a  high-output-current PWM converter that integrates a low-resistance, high-side N-channel MOSFET", Manufacturer="Texas Instruments", Part Number=TPS5450DDAR, ComponentLink1Description=Chip&Dip, ComponentLink1URL=https://www.chipdip.ru/product/tps5450ddar-2, ComponentLink2Description=DataSheet, ComponentLink2URL=https://static.chipdip.ru/lib/787/DOC004787015.pdf, Type=IC
Y1: library part "Crystal 8MHz SMD", "Crystal. HC-49SM (US)", Manufacturer=China, Part Number=8.000MHzHC-49SM, ComponentLink1Description=Chip&Dip, ComponentLink1URL=https://www.chipdip.ru/product/8mhz-hc-49sm, Type=Crystal

## Free pads (board coordinates)
  round 6 hole 3.2: 2(63.2,61.1) 3(4,61.1) 4(4,4) 5(63.2,4)

## Via types
v1: diameter 1.27, hole 0.711, Top Layer to Bottom Layer, tented both sides, 38 vias
v2: diameter 0.8, hole 0.4, Top Layer to Bottom Layer, tented both sides, 25 vias
v3: diameter 1.27, hole 0.711, Top Layer to Bottom Layer, 8 vias
v4: diameter 1.27, hole 0.711, Top Layer to Bottom Layer, tented top, 1 vias

## Nets (pads, with @x,y where several pads share a name; then routed paths per layer and width w, separated by ;. In a path a pad name is that pad's centre, name@x,y a point inside that pad or via, vN(x,y) a via of type N, cw(c..) or ccw(c..) an arc to the next point about the centre after c; other vN are vias at no path point)
+3.3V: C2.2 C7.1 C8.1 C9.1 C10.1 C11.1 C12.1 C15.1 D1.2 D4.2 D5.2 U1.2 U2.1 U2.13 U2.19 U2.32 U2.48 U2.64 U5.16 | length 59.2
  Top Layer w0.2: v1(10.2,50) D4.2 14.3,51.6 16.3,53.6 17.233,53.6 17.35,53.483 ; v1(11.7,42.6) 13.6,42.6 13.949,42.949 U2.64 ; v1@16.2,41.9 16.5,42.2 17.1,42.2 17.35,41.95 U2.1 ; U2.48 17.35,53.483 ; v1(17.4,54.5) 17.35,54.45 17.35,53.483 ; U2.13 23.35,38.877 24.327,37.9 25.236,37.9 25.736,37.4 26.2,37.4 26.5,37.1 26.5,35.3 25.5,34.3 v1(25.5,34.1) ; D1.2 23.9,25.45 U1.2 24.7,25.4 25,25.7 25,26.8 v1(25.4,27.2) ; U2.19 28.494,43.949 v1(28.672,44.128) ; U2.32 v1(28.651,50.449) ; U5.16 v1(51.2,15.4) 53.7,15.4 56,13.1 58.7,13.1 59.3,13.7 D5.2
  Bottom Layer w0.2: C10.1 11,43.3 v1(11.7,42.6) ; C11.1 15.415,41.2 16.038,41.823 v1(16.115,41.823) ; C7.1 16.28,54.5 v1(17.4,54.5) ; v1(25.5,34.1) 25.62,34.1 26.12,33.6 C12.1 ; v1(28.651,50.449) 30.631,50.449 C8.1 ; v1(28.672,44.128) 28.728,44.128 29.8,45.2 30.68,45.2 C9.1
+5V: C1.2 C24.2 Co1.2 Co2.2 Co3.2 Do2.2 J5.A4 Lo1.2 Rfb1.2 U1.3 U3.3 U4.3 | length 108.6
  Top Layer w0.4: Rfb1.2 9.4,24.71 9.4,25.7 9.7,26 22.4,26 22.599,25.8 23.1,25.3 23.1,23.8 23.6,23.3 U1.3 ; 22.7,12.6 24.6,12.6 25.4,13.4 25.4,22.035 25.05,22.385 25.05,23.15 U1.3 ; v1(26.4,23.3) U1.3 ; J5.A4@34.41,57.225 34.4,57.215 34.4,55.8 35,55.2 36,55.2 37.2,54 37.2,50.82 38.12,49.9 ; U3.3 37.7,40.441 37.7,41.6 38.12,42.02 38.12,42.9 ; J5.A4@39.2,57.35 39.2,56.3 39.82,55.68 39.82,54.8 39.8,54.78 C24.2@39.8,53.2 ; C24.2 39.811,53.091 39.811,52.311 38.12,50.62 38.12,49.9 ; v1(48.4,39.3) 44.8,42.9 38.12,42.9 ; 38.12,42.9 38.12,49.9
  Bottom Layer w0.4: C1.2 27.78,23.3 v1(26.4,23.3) 27.355,24.255 30.255,24.255 42,36 46.7,36 48.4,37.7 v1(48.4,39.3) 48.4,40.366 48.166,40.6 46.3,40.6 45.788,40.088 45.788,39.048 U4.3
+24V: C19.2 Cin1.2 Cin2.2 Cin3.2 Din1.2 J1.5 Udc1.7 | length 44.6
  Top Layer w0.8: v1(15.5,27.5) C19.2 v1(18.7,30.8)
  Bottom Layer w0.8: 15.3,18.7 15.4,18.6 19.3,18.6 20.5,19.8 20.5,24.4 17.4,27.5 v1(15.5,27.5) ; v1(18.7,30.8) 20.4,29.1 21.6,29.1 25.24,25.46 25.24,20.56 26.9,18.9 30.621,18.9 31.621,19.9 J1.5
  other v2: 13.425,4.875 15.125,4.875 13.4,6.625 15.1,6.625 13.15,16.85 15.15,16.95
DL_CAN1_N: T2.2 U4.6 | length 2.3
  Bottom Layer w0.2: U4.6 45.8,33.941 45.8,33.1 46.025,32.875 46.025,32.175 T2.2
DL_CAN1_P: T2.1 U4.7 | length 2.4
  Bottom Layer w0.2: T2.1 44.15,32.25 44.15,32.85 44.384,33.084 44.384,33.915 U4.7
DL_CAN_N: D3.2 J1.6 SB2.1 T2.3 | length 29.2
  Bottom Layer w0.2: J1.6 36.44,18 42.9,18 44.425,19.525 44.425,24.025 45.1,24.7 45.95,24.7 45.95,27 T2.3 46.35,27.3 48.1,27.3 48.6,27.8 50.1,27.8 50.45,28.15 SB2.1
DL_CAN_P: D3.1 J1.7 R4.2 T2.4 | length 17.7
  Bottom Layer w0.2: J1.7 38.655,18.325 42.725,18.325 44,19.6 44,24.75 D3.1 44.05,27.1 T2.4 R4.2@42.1,27.35
DL_CAN_RX: U2.33 U4.4 | length 33.8
  Top Layer w0.2: v4(24.8,50) 24.84,50.04 24.84,52.489 U2.33
  Bottom Layer w0.2: v4(24.8,50) 24.8,46.6 34.3,37.1 46.7,37.1 47.01,37.41 U4.4
DL_CAN_TX: U2.34 U4.1 | length 29
  Top Layer w0.2: v3(24.3,55.1) 24.34,55.06 24.34,52.509 U2.34
  Bottom Layer w0.2: v3(24.3,55.1) 28.4,55.1 43.2,40.3 U4.1
GND: B1.2 C1.1 C2.1 C3.2 C4.2 C5.1 C6.2 C7.2 C8.2 C9.2 C10.2 C11.2 C12.2 C13.1 C15.2 C16.1 C18.1 C19.1 C20.1 C21.1 C22.1 C23.2 C24.1 Cin1.1 Cin2.1 Cin3.1 Co1.1 Co2.1 Co3.1 D1.1 D2.3 D3.3 Din1.1 Do1.1 Do2.1 J1.8 J2.1 J3.2 J4.3 J5.A1 J5.A12 pad.2 pad.3 pad.4 pad.5 R2.2 R6.1 R7.1 Rfb2.1 U1.1 U2.12 U2.18 U2.31 U2.47 U2.63 U3.2 U3.8 U4.2 U4.8 U5.15 Udc1.6 Udc1.A | length 152.5
  Top Layer w0.2: v1(12.9,44.9) 13.035,44.765 13.035,43.965 13.551,43.449 U2.63 ; U2.47 U2.47@17.86,52.489 ; v1(22.2,39.2) 22.85,39.85 U2.12 ; v3(34.6,53.1) R6.1 ; U3.2 38.93,41.73 39.2,42 43.4,42 v1(44.5,40.9) ; U3.8 40.2,35.2 40.408,34.992 40.708,34.992 v1(41.6,34.1) ; v1(46.8,18.5) v1@47.025,18.5 ; v1(50.76,22) 50.525,22 v1@47.025,18.5 ; U5.15 51.85,18.334 51.684,18.5 v1@47.025,18.5
  Top Layer w0.5: 11.702,17.85 13.225,17.85 13.865,18.49 13.865,18.523 13.915,18.573 Udc1.6
  Top Layer w0.8: Udc1.A@13.915,20.915 v2(13.975,20.975) ; Udc1.A@13.915,21.75 Udc1.A
  Top Layer w1: Udc1.A@13.915,20.975 Udc1.A@13.915,21.75
  Bottom Layer w0.2: J4.3 11.46,53.02 12.74,54.3 C7.2 ; C10.2 10.14,44.9 v1(12.9,44.9) ; v1@13.1,45 15.2,47.1 R2.2@19.4,47.1 ; C11.2 12.5,41.2 12.035,40.735 12.035,39.835 v1(12,39.8) 12.9,38.9 C4.2 14.9,38.9 15.528,38.272 15.528,38.253 15.982,37.8 17,37.8 17.2,37.6 17.2,36.582 16.3,35.682 16.3,34.9 C3.2 ; v1(18.9,49.9) 19.4,49.4 R2.2@19.4,47.1 ; R2.2 R2.2@19.4,47.1 ; v1(22.1,26.96) 22.1,26.8 22.84,26.06 C2.1 ; v1(22.2,39.2) 22.218,39.182 22.218,38.382 25.4,35.2 v1(27.8,35.2) ; C6.2 26.9,37.9 27.1,37.7 27.34,37.7 27.84,37.2 27.84,35.24 v1(27.8,35.2) ; v1(27.1,26.8) 27.8,26.1 C1.1 ; C12.2 28.28,34.43 27.8,34.91 v1(27.8,35.2) ; C9.2 30.7,47.4 32.1,48.8 v1(32.2,48.8) ; C8.2 v1@31.88,48.82 ; v1(33.9,61.8) R7.1 ; v3(34.6,53.1) 39.4,53.1 v3(41.5,51) ; v1(41.6,34.1) U4.8@43.101,34.1 ; U4.2 44.47,40.87 v1(44.5,40.9) 45.3,41.7 48.3,41.7 49.517,40.483 49.517,37.417 47.5,35.4 43.6,35.4 43.2,35 U4.8 43.2,32.7 42.7,32.2 42.7,31.5 43.8,30.4 47.52,30.4 C13.1@47.6,30.48 ; D3.3@45.197,22.7 46.1,22.7 46.8,22 v1(46.8,18.5) C15.2 ; v1(50.76,22) 50.725,22.035 50.725,22.2 51.325,22.8 52.2,22.8 C22.1 52.4,22.217 52.517,22.1 ; 52.518,22.1 53.275,21.343 53.275,19.108 53.843,18.54 54.556,18.54 55.475,19.459 55.475,22.325 C23.2@54.859,22.941 ; C23.2 v1(56.5,23) ; C21.1 v1(56.9,6.4)
  other v2: 23.975,1.9 21.875,1.925 9.475,2.4 11.475,2.4 9.475,8.9 10.975,16.4 9.475,17.4 10.975,18.9 9.475,19.9 12.475,20.975 15.475,20.975 16.975,20.975 18.475,20.975 12.45,22.625 13.975,22.625 15.475,22.625 16.975,22.625 18.475,22.625
MAINCAN1_N: T1.2 U3.6 | length 2.4
  Top Layer w0.2: T1.2 37.3,33.5 37.3,34.1 37.7,34.5 37.7,35.361 U3.6
MAINCAN1_P: T1.1 U3.7 | length 2.4
  Top Layer w0.2: U3.7 38.9,35.371 38.9,34.5 39.3,34.1 39.3,33.6 T1.1
MAINCAN_N: D2.2 J1.1 J1.3 SB1.1 T1.3 | length 24.5
  Top Layer w0.2: J1.1 32.444,22.444 33.769,23.769 35.759,23.769 J1.3 37.45,22.81 37.45,27.4 37.3,27.55 37.3,28.55 T1.3 37.05,28.8 32.1,28.8 31.5,29.4 31.5,32.7 32.7,33.9 33.588,33.9
MAINCAN_P: D2.1 J1.2 J1.4 R1.2 T1.4 | length 15.1
  Top Layer w0.2: J1.4 39.35,22.717 39.35,27.4 39.6,27.65 T1.4 R1.2@42,28.75
  Bottom Layer w0.2: J1.2 35.9,23.8 37.8,23.8 39.158,22.442 J1.4
MAINCAN_RX: U2.61 U3.4 | length 22.9
  Top Layer w0.2: U2.61 15.307,44.442 16.142,44.442 17.084,43.5 25.228,43.5 26.131,42.597 26.462,42.597 28.284,40.776 36.182,40.776 36.39,40.568 U3.4
MAINCAN_TX: U2.62 U3.1 | length 27.6
  Top Layer w0.2: U2.62 15.31,43.939 16.185,43.939 17.924,42.2 26.4,42.2 29.2,39.4 36.138,39.4 36.162,39.376 39.783,39.376 40.025,39.617 40.025,39.629 40.2,39.804 U3.1
MCU-CTS: J3.5 U2.14 U5.9 | length 62.7
  Top Layer w0.2: U2.14 23.85,39.85 25.6,38.1 39,38.1 52.7,24.4 64.4,24.4 64.8,24 64.8,21.22 J3.5 56.92,20.12 55.75,18.95 U5.9
MCU-RTS: J3.6 U2.15 U5.10 | length 54.8
  Top Layer w0.2: U2.15 24.36,40.889 24.36,40.228 24.368,40.22 24.368,39.932 24.495,39.805 25.395,39.805 v1(25.6,39.6) ; v1(28.7,37.24) 28.952,37.24 29.487,37.775 36.425,37.775 37.774,36.426 39.158,36.426 39.48,36.104 39.48,34.82 52,22.3 53.7,22.3 55.1,20.9 55.1,19.3 ; U5.10 55.1,19.3 ; J3.6 58.46,22.66 55.1,19.3
  Bottom Layer w0.2: v1(25.6,39.6) 27.6,39.6 28.7,38.5 v1(28.7,37.24)
NetC3_1: C3.1 U2.5 Y1.2 | length 13.6
  Top Layer w0.2: Y1.2 13.8,37.1 v1(13.9,37) 14.105,37.205 14.805,37.205 17.4,39.8 19.2,39.8 19.35,39.95 U2.5
  Bottom Layer w0.2: v1(13.9,37) C3.1
NetC4_1: C4.1 U2.6 Y1.1 | length 8.8
  Top Layer w0.2: v1(18.6,38.9) 18.6,37.729 19.229,37.1 Y1.1 19.85,37.15 U2.6
  Bottom Layer w0.2: C4.1 v1(18.6,38.9)
NetC5_2: C5.2 R1.1 R3.2 | length 8.8
  Top Layer w0.2: C5.2 R1.1@42,30.32
NetC13_2: C13.2 R4.1 R5.2 | length 7.1
  Bottom Layer w0.2: R4.1@42.433,28.92 R5.2
NetC14_1: C14.1 U5.3 | length 5.1
  Top Layer w0.2: C14.1 51.4,13.9 52.5,12.8 U5.3
NetC14_2: C14.2 U5.1 | length 2.2
  Top Layer w0.2: C14.2 U5.1
NetC16_2: C16.2 U5.2 | length 4.7
  Top Layer w0.2: C16.2 50.7,8.7 51.1,9.1 51.1,9.6 51.85,10.35 U5.2
NetC17_1: C17.1 U5.5 | length 6.6
  Top Layer w0.2: C17.1 52.217,6.483 53.383,6.483 53.8,6.9 U5.5
NetC17_2: C17.2 U5.4 | length 3.4
  Top Layer w0.2: C17.2 52.2,9.7 53.15,10.65 U5.4
NetC18_2: C18.2 U5.6 | length 4.1
  Top Layer w0.2: U5.6 54.45,10.55 54.2,10.3 54.2,8.717 54.317,8.6 C18.2
NetCb1_1: Cb1.1 Do1.2 Lo1.1 Udc1.8
NetCb1_2: Cb1.2 Udc1.1
NetD4_1: D4.1 J4.5 | length 7.2
  Top Layer w0.4: J4.5 10.2,46.68 D4.1
NetD5_1: D5.1 J3.1 | length 3
  Top Layer w0.2: D5.1 63.66,10 J3.1
NetJ5_A5: J5.A5 R6.2 | length 4.5
  Top Layer w0.2: R6.2@38,53 38,55.8 38.6,56.4 38.6,57.185 J5.A5
NetJ5_B5: J5.B5 R7.2 | length 5
  Top Layer w0.2: v1(35.54,58.765) 35.56,58.745 J5.B5
  Bottom Layer w0.2: v1(35.54,58.765) 35.54,59.04 36.58,60.08 R7.2
NetR2_1: R2.1 U2.60 | length 4.2
  Top Layer w0.2: U2.60 15.31,44.939 16.861,44.939 v1@16.9,44.9
  Bottom Layer w0.2: v1@17.7,45 v1(17.3,45) 19.2,45 R2.1
NetR3_1: R3.1 SB1.2 | length 2.3
  Top Layer w0.2: SB1.2 34.883,34 35,33.883 35,32.08 R3.1
NetR5_1: R5.1 SB2.2 | length 2.1
  Bottom Layer w0.2: SB2.2 48.95,31.65 49.5,31.1 R5.1
NetRfb1_1: Rfb1.1 Rfb2.2 Udc1.4 | length 4.1
  Top Layer w0.381: Rfb1.1 Rfb1.1@10.93,24.65 ; Rfb2.2 Rfb1.1@10.93,24.65 ; Udc1.4 12.645,24.65 Rfb1.1@10.93,24.65
NRST: B1.1 C6.1 J4.1 U2.7 | length 45.2
  Top Layer w0.2: J4.1 5.86,52.5 5.1,52.5 4.65,52.05 4.65,39.15 7.4,36.4 8.2,35.6 23.2,35.6 23.5,35.9 B1.1 ; v1(25.31,36.61) 23.59,36.61 B1.1 ; U2.7@20.349,40.898 20.349,39.751 21.9,38.2 22.5,38.2 23.017,37.683 23.017,37.183 B1.1 ; U2.7@20.349,40.898 U2.7
  Bottom Layer w0.2: v1(25.31,36.61) 25.6,36.61 26.01,37.02 C6.1
OTG_FS_DM_1: J5.A7 J5.B7 U2.44 | length 28.7
  Top Layer w0.2: U2.44 19.35,53.65 25,59.3 34.5,59.3 35.075,59.875 36.025,59.875 36.4,59.5 36.4,58.4 36.06,58.06 ; J5.A7 36.06,58.06 ; J5.B7 37.56,55.742 37.443,55.625 36.177,55.625 36.06,55.742 36.06,58.06
OTG_FS_DP_1: J5.A6 J5.B6 U2.45 | length 32.1
  Top Layer w0.2: U2.45 18.85,53.75 24.9,59.8 34.54,59.8 34.94,60.2 36.6,60.2 37,59.8 37,59.625 J5.A6@37,57.4 ; J5.B6 36.56,56.125 36.677,56.008 36.943,56.008 37.06,56.125 37.06,59.625 J5.A6@37.06,57.4
PC-CTS: C21.2 J2.7 U5.7 | length 34.5
  Top Layer w0.254: v1(54,13.7) 55.1,12.6 U5.7 55.1,10.2 v3(55.2,10.1)
  Bottom Layer w0.254: v1(54,13.7) 60.8,20.5 60.8,37.4 59.1,39.1 J2.7 ; C21.2 v3(55.2,10.1)
PC-RTS: C20.2 J2.8 U5.8 | length 35.7
  Top Layer w0.254: U5.8 C20.2 v3(59.3,11.7)
  Bottom Layer w0.254: J2.8 59.107,41.893 59.107,40.674 61.5,38.281 61.5,13.9 v3(59.3,11.7)
R1I: C23.1 J2.3 U5.13 | length 25.2
  Top Layer w0.254: U5.13 53.188,17.638 53.188,18.388 v3(54.2,19.4)
  Bottom Layer w0.254: v3(54.2,19.4) 54.2,20.477 54.523,20.8 C23.1 54.418,20.982 54.418,21.482 53.402,22.498 53.402,29.399 53.4,29.401 53.4,37.655 J2.3
R1O: J3.3 U2.17 U5.12 | length 68.5
  Top Layer w0.2: U2.17 26.91,42.939 29.861,42.939 v1(30,42.8) ; v3@41.572,38.828 49.1,31.3 58.9,31.3 65.6,24.6 65.6,18.101 63.7,16.201 J3.3 55.06,15.04 53.8,16.3 U5.12
  Bottom Layer w0.2: v1(30,42.8) 34,38.8 v3(41.7,38.8)
SWCLK: J4.4 U2.49 | length 11.5
  Top Layer w0.2: J4.4 9.98,49 12.4,49 13.849,50.449 U2.49
SWDIO: J4.2 U2.46 | length 18.9
  Top Layer w0.2: U2.46 18.34,52.509 18.34,54.46 19.2,55.32 v1(19.2,55.51)
  Bottom Layer w0.2: J4.2 11.46,55.56 19.15,55.56 v1(19.2,55.51)
T1I: J3.4 U2.16 U5.11 | length 65.4
  Top Layer w0.254: U2.16 24.85,41 25.8,41 28.3,38.5 39.6,38.5 47.3,30.8 58.8,30.8 65.2,24.4 65.2,19.08 J3.4 57.28,17.58 56.3,16.6 54.549,16.6 54.455,16.694 54.455,17.595 U5.11
T1O: C22.2 J2.4 U5.14 | length 31.8
  Top Layer w0.2: v3@52.34,19.071 52.452,18.958 52.452,17.648 U5.14
  Bottom Layer w0.2: v3(52.2,19.2) C22.2@52.2,20.6 ; C22.2 C22.2@52.2,20.6 ; J2.4 49.6,36.625 49.6,34.476 51.3,32.776 51.3,31.217 50.9,30.817 50.9,23.5 49.9,22.5 49.9,21.409 50.709,20.6 C22.2@52.2,20.6
pads on no net: J1.A J2.2 J2.5 J2.6 J2.9 J2.A J5.17 J5.18 J5.A8 J5.B8 J5.GND U2.2 U2.3 U2.4 U2.8 U2.9 U2.10 U2.11 U2.20 U2.21 U2.22 U2.23 U2.24 U2.25 U2.26 U2.27 U2.28 U2.29 U2.30 U2.35 U2.36 U2.37 U2.38 U2.39 U2.40 U2.41 U2.42 U2.43 U2.50 U2.51 U2.52 U2.53 U2.54 U2.55 U2.56 U2.57 U2.58 U2.59 U3.5 U4.5 Udc1.2 Udc1.3 Udc1.5

## Polygon pours and split planes (outlines as drawn)
GND on Top Layer "GND_L01_P000" (solid, remove dead copper, pour order 0): 0,0 0,65.1 67.2,65.1 67.2,0
+3.3V on Bottom Layer "+3.3V_L02_P001" (solid, remove dead copper, pour order 1): 0,0 0,65.1 67.2,65.1 67.2,0

## Keep-outs
Keep-Out Layer:
  the board outline again, w0.2

## Other copper
Top Layer:
  region net GND: 8.825,22.8 8.825,21.375 10.125,21.375 10.125,22.8
  region net NetCb1_2: 19.425,25.4 19.425,22.625 22,22.625 22,25.4
  region net +5V: 15.95,3.675 15.95,1.175 20.975,1.175 20.975,3.675
  region net GND: 13.6,21.275 13.6,18.761 14.225,18.761 14.225,21.275
  region net GND: 59.8,7.3 59.8,0.773 66.5,0.773 66.5,7.3
  region net GND: 0.6,7.2 0.6,0.7 7.3,0.7 7.3,7.2
  region net GND: 0.6,64.4 0.6,57.9 7.3,57.9 7.3,64.4
  region net GND: 59.8,64.3 59.8,57.8 66.5,57.8 66.5,64.3
  region net NetCb1_2: 19.7,25.4 15.975,25.4 15.8,25.225 15.8,24.05 16.025,23.825 19.509,23.825
  region net GND: 19.037,23.61 11.975,23.61 11.975,21.886 11.74,21.651 12.125,19.95 19.112,19.95 19.112,23.635
  region net NetCb1_1: 19.425,19.7 19.425,22.225 24.75,22.225 24.75,14.275 15.9,14.275 15.9,19.7
  region net GND: 12.4,21.65 10.286,21.65 9.948,21.987 8.825,21.897 8.825,1.175 12.459,1.175 12.459,17.674 12.125,18.05 12.125,19.7 12.4,19.975 12.425,19.975
  region net NetCb1_1: 16.366,17.016 14.212,14.863 14.212,9.113 15.925,7.4 18.975,7.4 18.975,13.4 20.625,15.05
  region net GND: 24.775,9.625 24.775,1.2 21.35,1.2 21.35,2.675 22.45,3.775 22.45,9 23.075,9.625
  region net +24V: 15.625,19.7 15.625,16.775 13.95,15.1 13.95,8.825 15.675,7.1 15.675,1.175 12.7,1.175 12.7,17.35 13.475,17.35 14.7,18.575 14.7,19.7
  region net +5V: 24.75,13.925 24.75,10 22.875,10 22.15,9.275 22.15,4.05 20.6,2.5 15.95,2.5 15.95,7 19.35,7 19.35,13.2 20.075,13.925
Bottom Layer:
  region net GND: 8.825,3.875 8.825,1.175 24.775,1.175 24.775,3.875
  region net GND: 10.95,23.65 10.95,19.975 19.125,19.975 19.125,23.65
  region net GND: 12,20.644 12,1.9 8.825,1.9 8.825,22 10.475,23.65 10.95,23.65
  region net +24V: 16.5,19.5 16.5,4.35 12.55,4.35 12.55,19.5